# EAGLE board air (EAGLE 9.0.0)

Size 100 x 80 mm. Coordinates in mm from the lower left corner, seen from the top.
Outline: 0,0 100,0 100,80 0,80 0,0
Copper layers (1*16): Top 0.035mm / dielectric 1.5mm / Bottom 0.035mm
Design rules "default": minimum track width 6mil, minimum drill 0.35mm, track to track 6mil, track to pad 6mil, pad to pad 6mil, via to via 6mil, smd to smd 6mil, copper to edge 40mil, drill to drill 6mil, minimum pad ring 10mil, minimum via ring 8mil, stop-mask expansion 4mil, vias tented up to drill 0mil, thermal gap 10mil

## Footprints (pad centres in the part's own frame; a part is rotated, then mirrored left to right if it is on the bottom)
C1206 = smd 1.6 x 1.8: 1 -1.4,0; 2 1.4,0
USB-B-MICRO-SMD = smd 1.45 x 0.4: D+ 2.725,0; D- 2.725,0.65; GND 2.725,-1.3; ID 2.725,-0.65; VBUS 2.725,1.3 | smd 1.5 x 1.8: SHIELD1 0,3.685; SHIELD2 0,-3.685 | smd 1.5 x 2.5: SHIELD3 0,0 | hole 0.85: 2.2,1.9; 2.2,-1.9
JST-4-PTH-VERT = drill 0.7 pad 1.6: 1 -3,-0.55; 2 -1,-0.55; 3 1,-0.55; 4 3,-0.55
L1812 = smd 1.9 x 3.4: 1 -1.95,0; 2 1.95,0
FC-12M = smd 0.7 x 1.4: 1 -0.85,0; 2 0.85,0
SOT23-BEC = smd 1 x 1.4: B -0.95,-1.1; C 0,1.1; E 0.95,-1.1
R0805 = smd 1.3 x 1.5: 1 -0.95,0; 2 0.95,0
TACTILE_SWITCH_PTH_6.0MM = drill 1.016 pad 1.88: 1 -3.251,2.261; 2 3.251,2.261; 3 -3.251,-2.261; 4 3.251,-2.261
QFN32-5X5MM = smd 0.8 x 0.285: 1 -2.5,1.75; 2 -2.5,1.25; 3 -2.5,0.75; 4 -2.5,0.25; 5 -2.5,-0.25; 6 -2.5,-0.75; 7 -2.5,-1.25; 8 -2.5,-1.75; 17 2.5,-1.75; 18 2.5,-1.25; 19 2.5,-0.75; 20 2.5,-0.25; 21 2.5,0.25; 22 2.5,0.75; 23 2.5,1.25; 24 2.5,1.75 | smd 0.285 x 0.8: 9 -1.75,-2.5; 10 -1.25,-2.5; 11 -0.75,-2.5; 12 -0.25,-2.5; 13 0.25,-2.5; 14 0.75,-2.5; 15 1.25,-2.5; 16 1.75,-2.5; 25 1.75,2.5; 26 1.25,2.5; 27 0.75,2.5; 28 0.25,2.5; 29 -0.25,2.5; 30 -0.75,2.5; 31 -1.25,2.5; 32 -1.75,2.5 | smd 3.15 x 3.15: EP 0,0
SOIC-8 = smd 0.61 x 1.702: 1 -1.905,-3.251; 2 -0.635,-3.251; 3 0.635,-3.251; 4 1.905,-3.251; 5 1.905,3.251; 6 0.635,3.251; 7 -0.635,3.251; 8 -1.905,3.251
SOIC16 = smd 0.635 x 1.524: 1 -4.445,-2.695; 2 -3.175,-2.695; 3 -1.905,-2.695; 4 -0.635,-2.695; 5 0.635,-2.695; 6 1.905,-2.695; 7 3.175,-2.695; 8 4.445,-2.695; 9 4.445,2.695; 10 3.175,2.695; 11 1.905,2.695; 12 0.635,2.695; 13 -0.635,2.695; 14 -1.905,2.695; 15 -3.175,2.695; 16 -4.445,2.695
SOT229P700X180-4N = smd 0.93 x 1.31: 1 -2.29,-3.345; 2 0,-3.345; 3 2.29,-3.345 | smd 3.24 x 1.31: 4 0,3.345
ANT-2.4GHZ-6.5X2.2MM = smd 1.016 x 2.54: FEED -3.302,0; NC 3.302,0

## Placement (x,y rotation side)
C1  22pF  [C1206]  -16.51,27.94 0 top  (outside the outline)
C2  10uF  [C1206]  -22.86,27.94 0 top  (outside the outline)
C3  10uF  [C1206]  -29.21,27.94 0 top  (outside the outline)
C4  22pF  [C1206]  -35.56,27.94 0 top  (outside the outline)
C5  0.1uF  [C1206]  -41.91,19.05 0 top  (outside the outline)
C6  10pF  [C1206]  -41.91,27.94 0 top  (outside the outline)
C7  10pF  [C1206]  -48.26,27.94 0 top  (outside the outline)
C8  5.6pF  [C1206]  -48.26,19.05 0 top  (outside the outline)
C11  10uF  [C1206]  -92.71,-88.9 0 top  (outside the outline)
C12  10uF  [C1206]  -92.71,-95.25 0 top  (outside the outline)
J1  [USB-B-MICRO-SMD]  -31.75,5.08 0 top  (outside the outline)
J2  [JST-4-PTH-VERT]  -17.78,34.29 0 top  (outside the outline)
L1  [L1812]  -72.39,-52.07 0 top  (outside the outline)
L2  [L1812]  -81.28,-52.07 0 top  (outside the outline)
Q1  FC-12M  [FC-12M]  -39.37,34.29 0 top  (outside the outline)
Q2  FC-26M  [FC-12M]  -46.99,34.29 0 top  (outside the outline)
Q3  [SOT23-BEC]  -25.4,33.02 0 top  (outside the outline)
Q4  [SOT23-BEC]  -30.48,33.02 0 top  (outside the outline)
R1  12k  [R0805]  -55.88,-36.83 0 top  (outside the outline)
R2  50  [R0805]  -55.88,-43.18 0 top  (outside the outline)
R3  100  [R0805]  -55.88,-11.43 0 top  (outside the outline)
R4  10k  [R0805]  -55.88,-17.78 0 top  (outside the outline)
R5  10k  [R0805]  -55.88,-30.48 0 top  (outside the outline)
R6  10k  [R0805]  -55.88,-49.53 0 top  (outside the outline)
R7  10k  [R0805]  -55.88,-55.88 0 top  (outside the outline)
R8  10k  [R0805]  -55.88,-24.13 0 top  (outside the outline)
S1  PUSH BUTTON  [TACTILE_SWITCH_PTH_6.0MM]  -26.67,20.32 0 top  (outside the outline)
U1  ESP8266  [QFN32-5X5MM]  -34.29,20.32 0 top  (outside the outline)
U2  W25Q32FV  [SOIC-8]  -17.78,20.32 0 top  (outside the outline)
U3  CH340G  [SOIC16]  -41.91,3.81 0 top  (outside the outline)
U4  AMS1117-3.3  [SOT229P700X180-4N]  -90.17,-78.74 0 top  (outside the outline)
U$2  2.45GHz  [ANT-2.4GHZ-6.5X2.2MM]  -17.78,40.64 0 top  (outside the outline)

## Library data of the parts
C1-C8 C11 C12 = rcl; SPICEPREFIX: C
J1 = SparkFun-Connectors; PROD_ID: CONN-11752
J2 = SparkFun-Connectors; PROD_ID: CONN-13251
L1 L2 = rcl; SPICEPREFIX: L
Q1 Q2 = crystal
Q3 Q4 = transistor-npn
R1-R8 = rcl; SPICEPREFIX: R
S1 = SparkFun-Switches; PROD_ID: SWCH-08441; SF_SKU: COM-00097
U1 = SparkFun-RF; PROD_ID: IC-12452
U2 = SparkFun-IC-Memory; PROD_ID: IC-13229
U3 = ch340g
U4 = AMS1117-3.3; AVAILABILITY: Unavailable; DESCRIPTION: Sot-89; MF: ams; MP: AMS1117-3.3; PACKAGE: SOT-89 ams; PRICE: None
U$2 = SparkFun-RF; PROD_ID: ANT-08187; SF_ID: WRL-00144

## Nets
+3V3: C2.1 C3.1 C5.1 C12.1 R4.2 R8.2 U1.1 U1.3 U1.4 U1.11 U1.17 U1.29 U1.30 U2.8 U3.4 U3.16 U4.2
+5V: C11.1 J1.VBUS J2.4 U4.3
GND: C1.2 C2.2 C3.2 C4.2 C5.2 C6.2 C7.2 C11.2 C12.2 J1.GND J2.3 L1.1 L2.1 R1.1 R5.1 S1.3 U1.EP U2.4 U3.1 U4.1
GPIO0: Q3.C R4.1 U1.15
N$1: R3.1 U1.21
N$2: C6.1 Q2.1 U1.27
N$3: J1.D+ U3.5
N$4: C7.1 Q2.2 U1.28
N$5: R1.2 U1.31
N$6: J1.D- U3.6
N$7: C1.1 Q1.1 U3.7
N$8: C4.1 Q1.2 U3.8
N$9: R2.2 S1.1
N$10: C8.1 L1.2 U1.2
N$11: C8.2 L2.2 U$2.FEED
N$12: R8.1 U1.14
N$14: Q4.E R6.1 U3.14
N$15: Q3.E R7.1 U3.13
N$16: Q3.B R6.2
N$17: Q4.B R7.2
PWM_BLUE: U1.9
PWM_GREEN: R5.2 U1.13
PWM_RED: U1.10
RST: Q4.C R2.1 U1.32
RX: U1.25 U3.3
SD_CLK: R3.2 U2.6
SD_CS: U1.20 U2.1
SD_D0: U1.22 U2.2
SD_D1: U1.23 U2.5
SD_D2: U1.18 U2.7
SD_D3: U1.19 U2.3
SDS011_RX: J2.2 U1.16
SDS011_TX: J2.1 U1.24
TX: U1.26 U3.2

## Tracks (layer width: path | path; a pad name or v marks a point on that pad's centre or on a via)
+3V3  (16 unrouted)
+5V  (3 unrouted)
GND  (19 unrouted)
GPIO0  (2 unrouted)
N$1  (1 unrouted)
N$2  (2 unrouted)
N$3  (1 unrouted)
N$4  (2 unrouted)
N$5  (1 unrouted)
N$6  (1 unrouted)
N$7  (2 unrouted)
N$8  (2 unrouted)
N$9  (1 unrouted)
N$10  (2 unrouted)
N$11  (2 unrouted)
N$12  (1 unrouted)
N$14  (2 unrouted)
N$15  (2 unrouted)
N$16  (1 unrouted)
N$17  (1 unrouted)
PWM_GREEN  (1 unrouted)
RST  (2 unrouted)
RX  (1 unrouted)
SD_CLK  (1 unrouted)
SD_CS  (1 unrouted)
SD_D0  (1 unrouted)
SD_D1  (1 unrouted)
SD_D2  (1 unrouted)
SD_D3  (1 unrouted)
SDS011_RX  (1 unrouted)
SDS011_TX  (1 unrouted)
TX  (1 unrouted)